# EAGLE board STorM32 NT logger v11 (EAGLE 7.5.0)
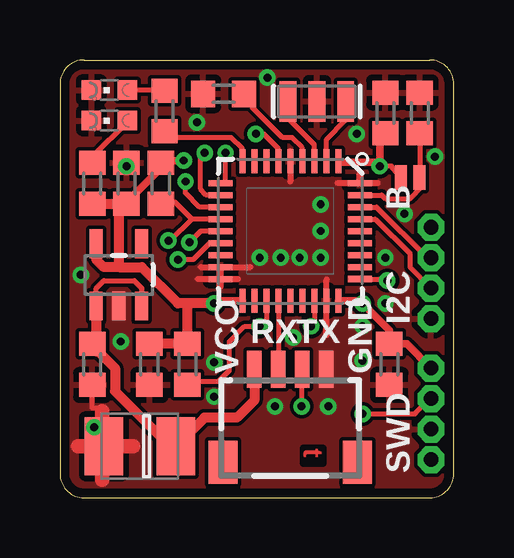
[diagram p0: board, top side]
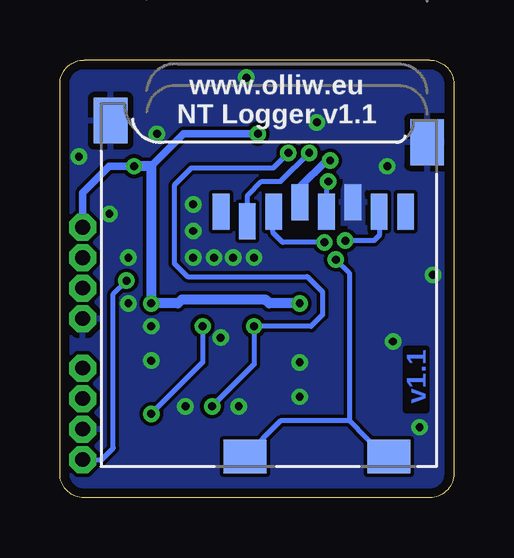
[diagram p1: board, bottom side, seen from below]

Size 16.43 x 18.24 mm. Coordinates in mm from the lower left corner, seen from the top.
Outline: 1,18.24 15.43,18.24 arc-90 16.43,17.24 16.43,1 arc-90 15.43,0 1,0 arc-90 0,1 0,17.24 arc-90 1,18.24
Copper layers (1*16): Top 0.0356mm / dielectric 1.5011mm / Bottom 0.0356mm
Design rules "ow-oshpark-2layer": minimum track width 6mil, minimum drill 13mil, track to track 6mil, track to pad 6mil, pad to pad 6mil, via to via 6mil, smd to smd 6mil, copper to edge 15mil, drill to drill 6mil, minimum pad ring 7mil, minimum via ring 7mil, stop-mask expansion 2.5mil, vias tented up to drill 26mil, thermal gap 10mil

## Footprints (pad centres in the part's own frame; a part is rotated, then mirrored left to right if it is on the bottom)
SMC_B = smd 1.6 x 2.4: + -1.5,0; - 1.5,0
C0603 = smd 1 x 1.1: 1 -0.85,0; 2 0.85,0
SOT23-5 = smd 0.55 x 1.2: 1 -0.95,-1.3; 2 0,-1.3; 3 0.95,-1.3; 4 0.95,1.3; 5 -0.95,1.3
4X1_1P27_OCT_BILEX = drill 0.61 pad 1.118 octagon: 1 0,0; 2 0,-1.27; 3 0,-2.54; 4 0,-3.81
CHIPLED_0603 = smd 0.8 x 0.8: A 0,-0.75; C 0,0.75
SM04B-SRSS-TB = smd 0.6 x 1.55: 1 -1.5,2.975; 2 -0.5,2.975; 3 0.5,2.975; 4 1.5,2.975 | smd 1.2 x 1.8: FIT@1 -2.8,-0.9; FIT@2 2.8,-0.9
R0603 = smd 1 x 1.1: 1 -0.85,0; 2 0.85,0
SJ_2S-NO = smd 0.508 x 1.016: 1 -0.381,0; 2 0.381,0
VFQFPN36 = smd 1 x 0.25: 1 -2.9,2; 2 -2.9,1.5; 3 -2.9,1; 4 -2.9,0.5; 5 -2.9,0; 6 -2.9,-0.5; 7 -2.9,-1; 8 -2.9,-1.5; 9 -2.9,-2; 19 2.9,-2; 20 2.9,-1.5; 21 2.9,-1; 22 2.9,-0.5; 23 2.9,0; 24 2.9,0.5; 25 2.9,1; 26 2.9,1.5; 27 2.9,2 | smd 0.25 x 1: 10 -2,-2.9; 11 -1.5,-2.9; 12 -1,-2.9; 13 -0.5,-2.9; 14 0,-2.9; 15 0.5,-2.9; 16 1,-2.9; 17 1.5,-2.9; 18 2,-2.9; 29 1.5,2.9; 30 1,2.9; 31 0.5,2.9; 32 0,2.9; 33 -0.5,2.9; 34 -1,2.9; 35 -1.5,2.9; 36 -2,2.9 | smd 0.27 x 1: 28 2,2.9
MICROSD = smd 0.7 x 1.5: 1 9,-10.64; 2 7.9,-10.24; 3 6.8,-10.64; 4 5.7,-11.04; 5 4.6,-10.64; 6 3.5,-11.04; 7 2.4,-10.64; 8 1.3,-10.64 | smd 1.8 x 1.4: CD1 2,-0.44; CD2 8,-0.44 | smd 1.4 x 1.9: MT1 0.4,-13.54; MT2 13.6,-14.44
RESONATOR-SMD = smd 0.7 x 1.7: 1 -1.2,0; 2 0,0; 3 1.2,0

## Placement (x,y rotation side)
C1  10u/6.3V  [SMC_B]  3.33,2.14 180 top
C2  100n  [C0603]  1.35,5.56 270 top
C7  1u  [C0603]  3.73,5.56 270 top
C8  100n  [C0603]  6.83,16.83 180 top
C9  100n  [C0603]  13.73,5.56 270 top
C10  100n  [C0603]  2.78,13.1 90 top
C11  100n  [C0603]  13.57,16.03 90 top
IC2  [SOT23-5]  2.46,9.29 0 top
JP1  SWD  [4X1_1P27_OCT_BILEX]  15.48,11.27 0 top
JP2  SWD  [4X1_1P27_OCT_BILEX]  15.48,5.4 0 top
LED1  red  [CHIPLED_0603]  2.06,15.72 90 top
LED2  green  [CHIPLED_0603]  2.06,16.99 90 top
NTX  NTX  [SM04B-SRSS-TB]  9.6,2.38 0 top
R1  4.7k  [R0603]  1.35,13.1 90 top
R2  47k  [R0603]  4.21,13.1 90 top
R3  47k  [R0603]  5.32,5.56 90 top
R6  2.2k  [R0603]  4.37,16.11 90 top
R7  10k  [R0603]  15,16.03 270 top
SJ2  BOOT0  [SJ_2S-NO]  14.61,13.34 0 top
U1  STM32F10XTXU6  [VFQFPN36]  9.6,11.11 270 top
U$1  MICROSD  [MICROSD]  0.71,1.27 180 bottom
Y1  RESONATORSMD  [RESONATOR-SMD]  10.72,16.51 180 top

## Library data of the parts
C1 C2 C7-C11 R1-R3 R6 R7 = rcl
IC2 SJ2 Y1 = # SparkFun2
JP1 JP2 = # stdlib
LED1 LED2 = led
NTX = con-jst2
U1 = # stm32
U$1 = # adafruit

## Nets
3.3V: C7.1 C9.1 C10.1 C11.1 IC2.5 JP1.1 JP2.1 R1.1 R2.2 R3.2 SJ2.1 U1.1 U1.6 U1.19 U1.27 U$1.4
5V: C1.+ C2.1 IC2.1 IC2.3 NTX.1
CD1: U1.15 U$1.CD1 U$1.CD2
CS: U1.11 U$1.2
GND: C1.- C2.2 C7.2 C8.2 C9.2 C10.2 C11.2 IC2.2 JP1.4 JP2.3 LED1.C LED2.C NTX.4 R7.1 U1.5 U1.17 U1.18 U1.26 U1.36 U$1.6 U$1.MT1 U$1.MT2 Y1.2
LED: R6.1 U1.9
N$1: C8.1 U1.4
N$2: LED2.A R6.2
N$3: R7.2 SJ2.2 U1.35
N$5: U1.2 Y1.1
N$6: U1.3 Y1.3
N$9: LED1.A R1.2
RX: NTX.2 U1.22
SCK: U1.12 U$1.5
SCL: JP1.3 U1.33
SDA: JP1.2 U1.34
SDI: U1.14 U$1.3
SDO: R2.1 U1.13 U$1.7
SWCLK: JP2.4 U1.28
SWDIO: JP2.2 U1.25
TX: NTX.3 R3.1 U1.10 U1.21

## Tracks (layer width: path | path; a pad name or v marks a point on that pad's centre or on a via)
3.3V  (via drill 0.33)
  Top 0.152: IC2.5 1.54,10.64 | 12.5,8.21 v12.62,8.1 | U1.1 11.65,13.97
  Top 0.203: U1.6 9.1,14.55 8.49,15.16 v8.18,15.16 | 4.29,13.81 4.29,13.97 4.23,14.03 R2.2 4.26,13.97 | SJ2.1 13.83,13.81 v13.34,13.81
  Top 0.305: 2.72,12.25 4.29,13.81 | U1.27 12.5,8.21 | v12.62,8.1 13.73,6.99 C9.1 14.47,6.41 JP2.1 | U1.19 6.55,8.21 v6.43,8.1 | 11.65,13.97 13.18,13.97 v13.34,13.81 13.34,14.92 13.57,14.92 C11.1 | v5.16,14.05 4.45,14.05 4.37,13.97 4.26,13.97
  Top 0.406: IC2.5 1.51,9.92 1.83,9.6 2.46,9.6 | C7.1 R3.2 5.32,8.1 | R1.1 2.46,12.25 | 2.46,12.25 2.72,12.25 C10.1 | 2.46,9.6 3.41,9.6 4.92,8.1 5.32,8.1 | 2.46,9.6 2.46,12.25 | v6.43,8.1 5.32,8.1
  Bottom 0.305: U$1.4 6.41,12.95 5.32,14.05 v5.16,14.05 | 12.62,13.81 11.27,15.16 v8.18,15.16 | JP1.1 15.48,12.7 14.37,13.81 v13.34,13.81
  Bottom 0.406: v6.43,8.1 7.7,8.1 7.86,8.26 11.35,8.26 11.51,8.1 v12.62,8.1 12.62,13.81 v13.34,13.81
5V
  Top 0.152: 1.61,6.09 C2.1 1.51,6.09 | 3.41,8.07 IC2.3
  Top 0.203: IC2.1 1.51,8.73 1.83,9.05 3.1,9.05 3.41,8.73 3.41,8.07
  Top 0.406: NTX.1 8.1,4.06 7.38,3.33 6.02,3.33 C1.+ 4.21,2.54 2.3,4.45 2.3,5.4 1.61,6.09 | IC2.1 1.51,6.09
CD1  (via drill 0.33)
  Top 0.203: U1.15 6.25,10.61 5.56,9.92 v4.92,9.92
  Bottom 0.152: 8.97,1.81 U$1.CD2 | 2.94,1.75 2.78,1.39 U$1.CD1
  Bottom 0.203: v4.92,9.92 4.37,9.37 4.37,3.2 | 4.37,3.2 2.94,1.75 | 4.37,3.2 7.22,3.2 U$1.CD2
CS  (via drill 0.33)
  Top 0.203: U1.11 6.1,12.61 5.87,12.86 5.87,14.21 v6.03,14.37
  Bottom 0.203: U$1.2 8.61,12.58 8.02,13.18 7.22,13.18 v6.03,14.37
GND  (via drill 0.33 pad 0.61)
  Top 0.152: U1.17 6.7,9.48 6.67,9.45 | 12.5,13.18 12.66,13.17 U1.36
  Top 0.203: 1.76,3.61 1.75,3.53 1.75,3.73 1.35,3.73 C2.2
  Top 0.254: 9.6,14.45 9.6,13.18 | 13.26,13.11 11.59,13.11 | 5.87,9.6 7.94,9.6 | 5.75,9.12 7.42,9.12 | 11.12,6.79 11.12,9.09
  Top 0.305: 12.5,13.18 12.5,13.45 | 6.67,8.81 6.67,9.45
  Top 0.61: 1.76,0.75 1.76,3.61 | 3.06,2.15 0.75,2.15
  other vias: 10.87,11.11 10.87,12.22 8.33,10 10,10 10.87,10 2.54,6.51 6.43,5.64 11.19,3.81 8.97,3.81 9.72,6.67 13.57,10 0.87,9.29 1.43,2.94 13.57,8.1 6.43,4.21 12.38,15.16 2.78,13.81 12.62,5.71 5.71,15.64 8.65,17.5 15.64,14.21 12.62,7.14 14.37,11.83 9.21,10
  pour Bottom (isolate 0.152): 0.41,17.16 arc-90 1.08,17.83 15.35,17.83 arc-90 16.02,17.16 16.02,1 arc-90 15.35,0.33 1.08,0.33 arc-90 0.41,1
  pour Top (isolate 0.152): 0.41,17.16 arc-90 1.08,17.83 15.35,17.83 arc-90 16.02,17.16 16.02,1 arc-90 15.35,0.33 1.08,0.33 arc-90 0.41,1
  pour Top (no thermals): 10.56,6.35 11.83,6.35 11.83,4.13 10.56,4.13
  pour Bottom (isolate 0.254, rank 2, no thermals): 3.73,13.34 3.73,11.27 4.68,11.27 4.68,13.34
  pour Top (no thermals): 1.98,7.14 1.98,8.57 2.14,8.73 2.78,8.73 2.94,8.57 2.94,7.14
LED
  Top 0.203: U1.9 7.6,14.54 7.14,15 4.76,15 4.52,15.24 4.34,15.24 R6.1
N$1
  Top 0.152: 8.02,16.73 C8.1
  Top 0.203: U1.4 10.1,14.58 9.68,15 9.29,15 8.02,16.27 8.02,16.73
N$2
  Top 0.152: R6.2 4.1,16.88 4.13,16.99
  Top 0.203: 4.13,16.99 LED2.A
N$3
  Top 0.152: 15.08,13.19 SJ2.2 15,13.35
  Top 0.203: U1.35 13.42,12.61 13.57,12.46 14.61,12.46 15.08,12.94 15.08,13.19 | R7.2 15,13.35
N$5
  Top 0.203: U1.2 11.1,14.91 11.92,15.73 Y1.1
N$6
  Top 0.203: U1.3 10.6,14.72 9.44,15.88 Y1.3
N$9
  Top 0.152: 2.86,15.72 LED1.A
  Top 0.203: 2.86,15.72 1.35,14.21 R1.2
RX
  Top 0.152: 9.29,5.22 NTX.2 9.13,5.54
  Top 0.203: U1.22 9.1,5.82 9.13,5.79 9.13,5.54
SCK  (via drill 0.33)
  Top 0.203: U1.12 5.83,12.11 5.24,12.7 v5.24,13.18
  Bottom 0.152: 5.48,11.91 U$1.5
  Bottom 0.203: v5.24,13.18 5.31,13.09 U$1.5
SCL
  Top 0.203: U1.33 13.15,11.61 14.61,10.16 14.61,9.6 JP1.3
SDA
  Top 0.203: U1.34 13.21,12.11 15.32,10 JP1.2
SDI  (via drill 0.33)
  Top 0.203: U1.14 5.87,11.11 v5.4,10.64
  Bottom 0.152: 7.54,11.88 U$1.3
  Bottom 0.203: v5.4,10.64 7.14,10.64 7.54,11.03 7.54,11.88
SDO  (via drill 0.33)
  Top 0.203: 5.5,11.61 4.6,10.72 v4.52,10.72 | R2.1 4.79,12.33 5.5,11.61 | U1.13 5.5,11.61
  Bottom 0.203: U$1.7 3.11,10.94 3.33,10.72 v4.52,10.72
SWCLK  (via drill 0.33)
  Top 0.203: U1.28 13.56,9.11 v13.65,9.05
  Bottom 0.203: v13.65,9.05 14.21,8.49 14.21,2.06 14.68,1.59 JP2.4
SWDIO  (via drill 0.33)
  Top 0.203: v12.62,3.49 14.81,3.49 15.45,4.13 JP2.2 | U1.25 10.6,7.27 v10.48,7.14
  Bottom 0.203: v10.48,7.14 10.48,5.64 v12.62,3.49
TX  (via drill 0.33)
  Top 0.152: U1.10 6.7,13.06 6.91,13.18 | NTX.3 10.08,5.33
  Top 0.203: U1.21 8.6,7.41 v8.33,7.14 7.7,7.14 7.06,6.51 7.06,5.32 6.59,4.84 5.45,4.84 R3.1 | 6.91,13.18 v6.91,14.37 | 10.08,5.33 v10.08,3.81
  Bottom 0.203: v10.08,3.81 8.33,5.56 v8.33,7.14 5.95,7.14 5.48,7.62 5.48,8.57 6.11,9.21 11.11,9.21 11.67,9.76 11.67,13.02 10.95,13.73 7.54,13.73 v6.91,14.37

## Text on the board
Top: t
Bottom: v1.1
tNames: B | I2C | RX | TX | VCC | GND | SWD
bNames: www.olliw.eu / NT Logger v1.1